# Altium PCB Slave_Button.PcbDoc
Units mil, origin at the board's own origin, x right, y up, seen from the top; angles counter-clockwise.
Board outline 2015 x 3255 mil, 2 copper layers (Top Layer, Bottom Layer); 23 components, 16 nets, 93 pads, 0 vias.
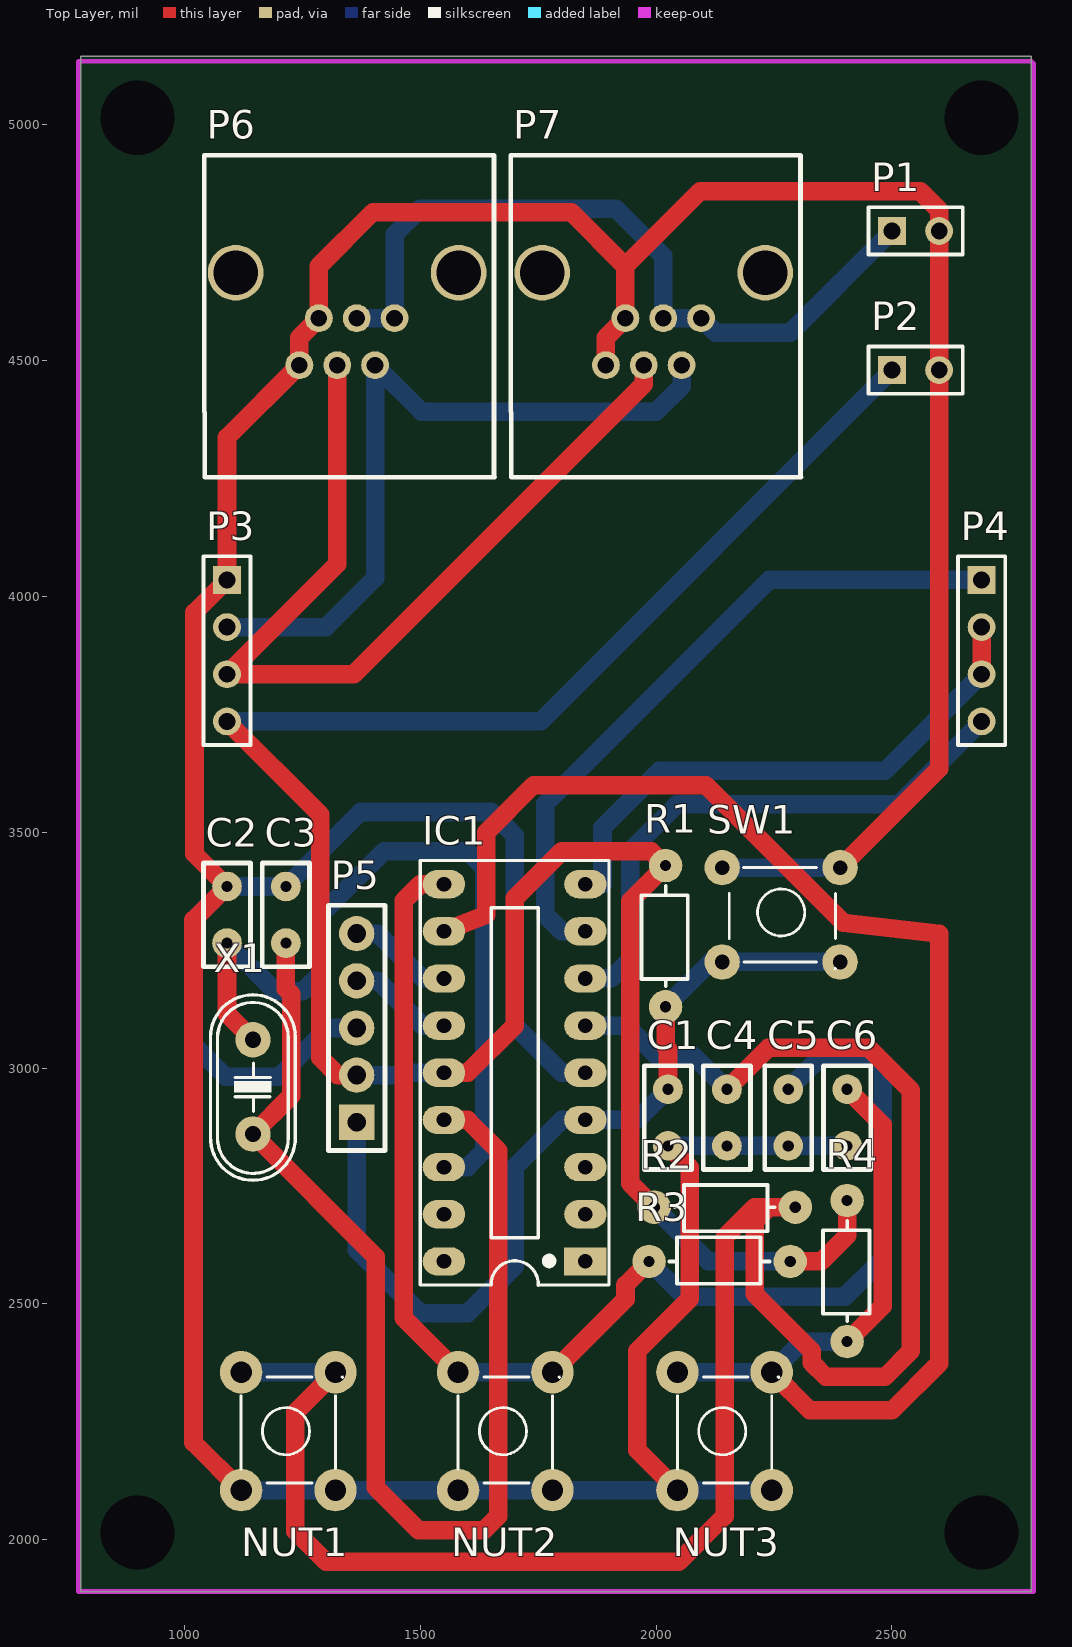
[diagram p0: Top Layer view]
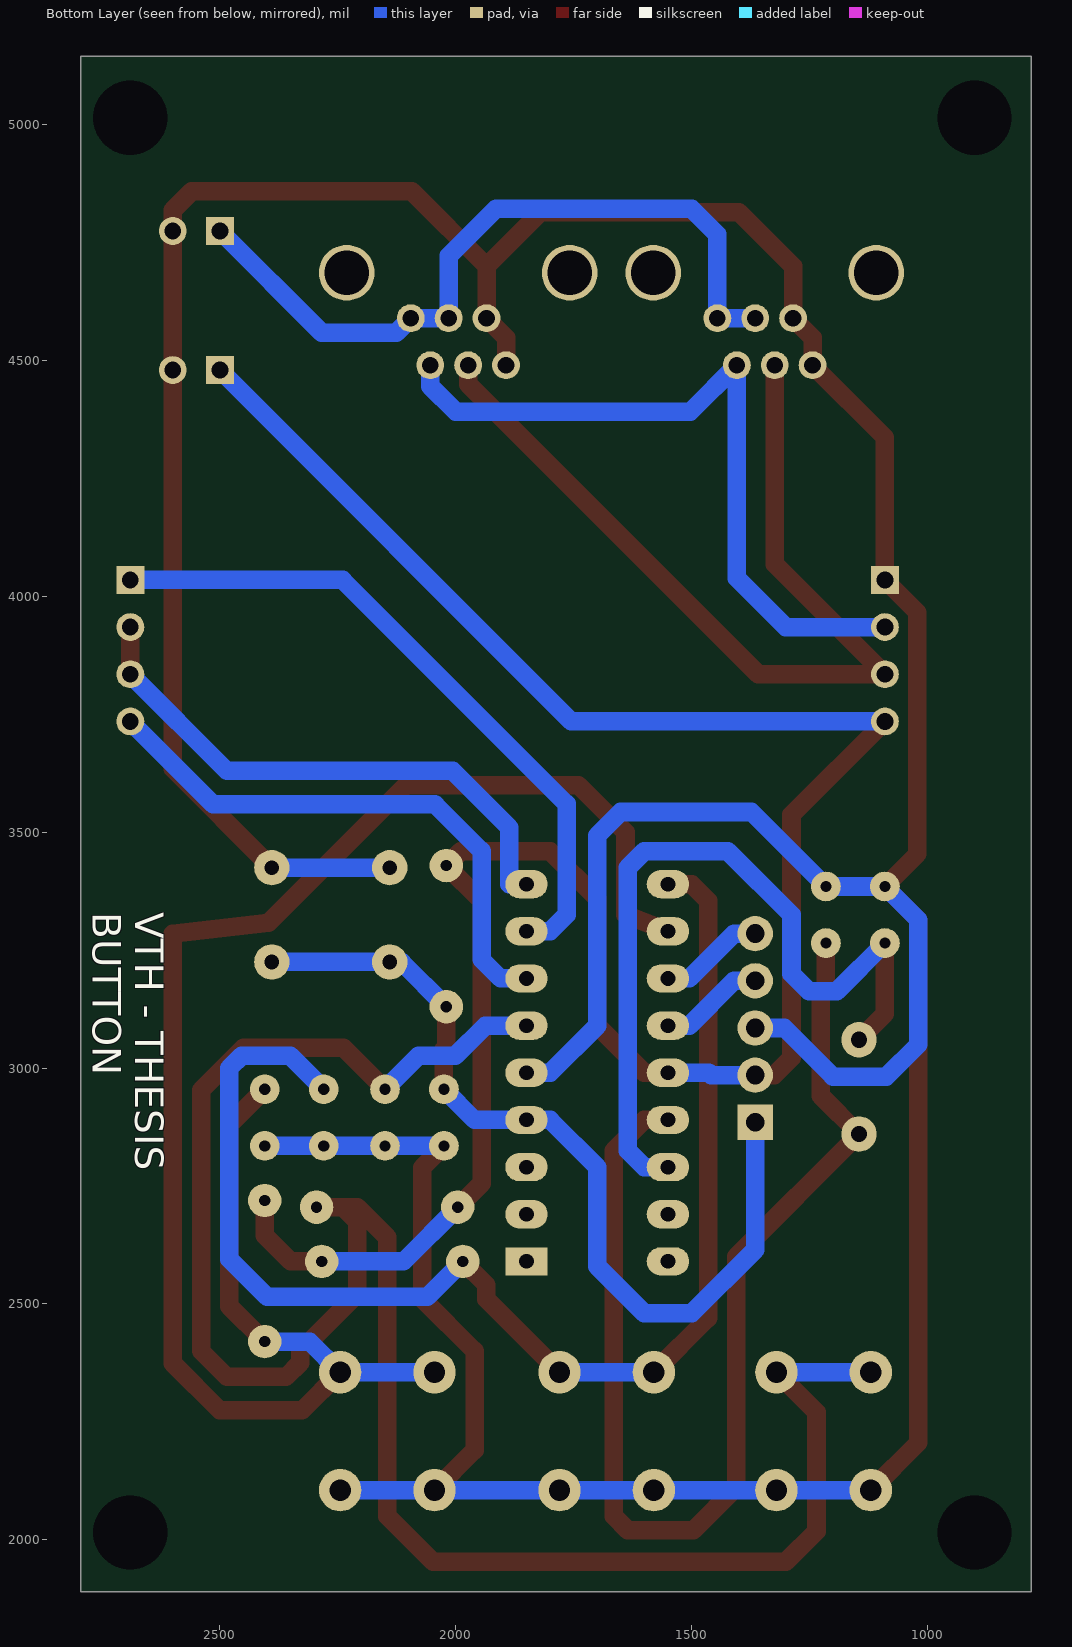
[diagram p1: Bottom Layer view, seen from below]
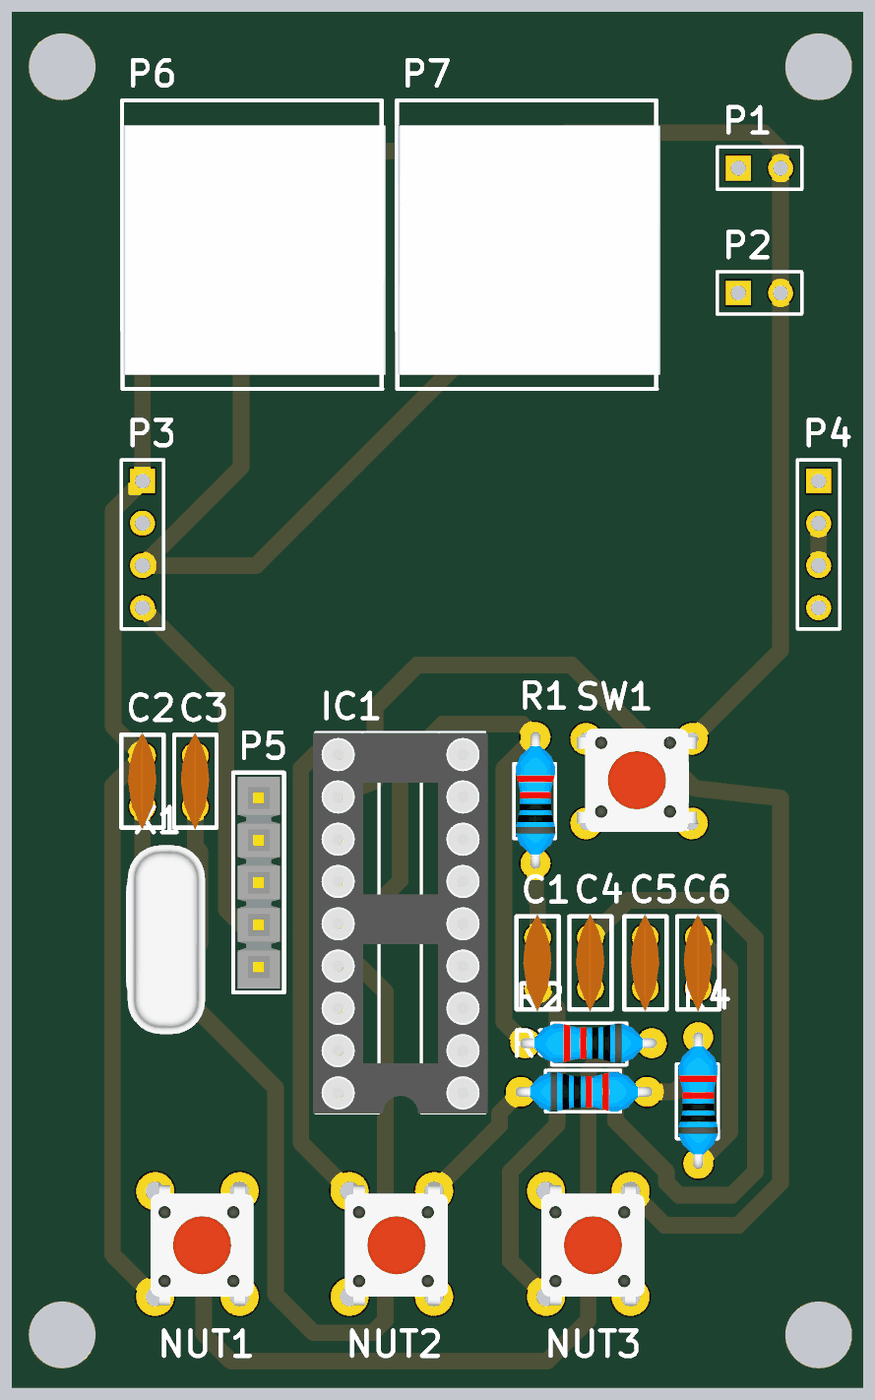
[diagram p2: 3D render of the assembled board from above, using the file's embedded part models]

## Layer stack, top to bottom
Top Solder: solder mask 0.4, Solder Resist, Dk 3.5
Top Layer: signal copper 1.4
Dielectric 1: dielectric 12.6, FR-4, Dk 4.8
Bottom Layer: signal copper 1.4
Bottom Solder: solder mask 0.4, Solder Resist, Dk 3.5

## Board outline
780,1890 2795,1890 2795,5145 780,5145

## Design rules (kind name [scope] priority, off if disabled: settings)
Clearance [All] p1: gap=19.68 ignorepadtopadclearanceinfootprint=FALSE
PolygonConnect [All] p1: connectstyle=Relief reliefconductorwidth=19.68 reliefentries=4 polygonreliefangle="90 Angle" airgapwidth=19.68
RoutingVias [All] p1: holewidth=28 width=50 viastyle="Through Hole" minholewidth=28 minwidth=50 maxholewidth=28 maxwidth=50
SolderMaskExpansion [All] p1: expansion=4
Width [All] p1: maxlimit=78.74 minlimit=19.68 preferedwidth=39.37
30 further rules are at their usual default settings.

## Components (designator, comment, footprint, x,y, rotation, side; value= is the part's Value field where it differs from the comment)
C1 "Capacitor Ceramic" "Cap Non-Pol 3mm" 2025,2895 r90 top value=100n
C2 "Cap Non-pol" "Cap Non-Pol 3mm" 1090,3325 r90 top value=22p
C3 "Cap Non-pol" "Cap Non-Pol 3mm" 1215,3325 r90 top value=22p
C4 "Capacitor Ceramic" "Cap Non-Pol 3mm" 2150,2895 r90 top value=100n
C5 "Capacitor Ceramic" "Cap Non-Pol 3mm" 2280,2895 r90 top value=100n
C6 "Capacitor Ceramic" "Cap Non-Pol 3mm" 2405,2895 r90 top value=100n
IC1 "PIC16F628A" DIP18/W0.3 1850,2590 r90 top
NUT1 "SW-4P-B" SW4#1 1120,2105 r90 top (schematic designator SW2)
NUT2 "SW-4P-B" SW4#1 1580,2105 r90 top (schematic designator SW3)
NUT3 "SW-4P-B" SW4#1 2045,2105 r90 top (schematic designator SW4)
P1 "Header 2" HDR1X2 2500,4775 r0 top
P2 "Header 2" HDR1X2 2500,4480 r0 top
P3 "Header 4" HDR1X4 1090,4035 r270 top
P4 "Header 4" HDR1X4 2690,4035 r270 top
P5 "Header 5" "Header 5" 1365,2885 r90 top
P6 "Header 8" RJ11 1403.98,4490.39 r180 top
P7 "Header 8" RJ11 2053.98,4490.39 r180 top
R1 "RES_SMD_0805" "RESISTOR 1/4W" 2020,3130 r90 top value=10k
R2 "RES_SMD_0805" "RESISTOR 1/4W" 2295,2705 r180 top value=10k
R3 "RES_SMD_0805" "RESISTOR 1/4W" 1985,2590 r0 top value=10k
R4 "RES_SMD_0805" "RESISTOR 1/4W" 2405,2420 r90 top value=10k
SW1 "SW7" SW4#2 2140,3425 r0 top value="Button chip 4 pin"
X1 "20Mhz" XT2 1145,2960 r90 top value=4Mhz

## Footprints (in the part's own frame and the unit in brackets; to place one, negate y for a bottom-side part, rotate by r counter-clockwise, add the part's x,y. Pads: shape width x height; smd on the part's side, far side on the other; paste and mask are expansions set on the pad)
"Cap Non-Pol 3mm" [mm] "Capacitor, Radial; Body 5.6 x 2.5 mm (L x W typ); Pin Spacing 3 mm (typ); Solder Pad 35mil"
  round 1.6 hole 0.6: 1(-1.524,0) 2(1.524,0)
  silkscreen extent -2.79,-1.27 2.79,1.27, body extent -2.92,-0.83 2.92,0.86, height 6.22
DIP18/W0.3 [mil] "18 PIN, W 300mil, Pitch 100mil"
  rect 60x90 hole 31: 1(0,0)
  oval 60x90 hole 31: 2(100,0) 3(200,0) 4(300,0) 5(400,0) 6(500,0) 7(600,0) 8(700,0) 9(800,0) 10(800,300) 11(700,300) 12(600,300) 13(500,300) 14(400,300) 15(300,300) 16(200,300) 17(100,300) 18(0,300)
  silkscreen extent -50,-50 850,350, body extent -51,-57 849,356, height 119
HDR1X2 [mm] "Connector; Header; 2 Position"
  rect 1.5x1.5 hole 0.9: 1(0,0)
  round 1.5 hole 0.9: 2(2.54,0)
  silkscreen extent -1.27,-1.27 3.81,1.27
HDR1X4 [mm] "Connector; Header; 4 Position"
  rect 1.5x1.5 hole 0.9: 1(0,0)
  round 1.5 hole 0.9: 2(2.54,0) 3(5.08,0) 4(7.62,0)
  silkscreen extent -1.27,-1.27 8.89,1.27
"Header 5" [mil] "Connector; Header; 5 Position; Solder Pad 35mil"
  rect 75x75 hole 40: 1(0,0)
  round 75 hole 40: 2(100,0) 3(200,0) 4(300,0) 5(400,0)
  silkscreen extent -60,-60 460,60, body extent -50,-50 450,50, height 83
"RESISTOR 1/4W" [mm] "P=0.25W, PITCH = 7.6 mm"
  round 1.8 hole 0.6: 1(0,0) 2(7.6,0)
  silkscreen extent 1.1,-1.2 6.5,1.3, body extent -0.31,-1.2 7.91,1.2, height 2.7
RJ11 [mm] "DIP 20, 20 PIN, W 300mil, Pin to pin 100mil"
  round 1.5 hole 0.9: 1(0,0) 2(2.04,0) 3(4.08,0) 4(-1.05,-2.53) 5(0.99,-2.53) 6(3.03,-2.53)
  round 3 hole 2.4: 7(-4.5,-4.98) 8(7.51,-4.98)
  silkscreen extent -6.43,-11.3 9.2,6.03, body extent -6.71,-9.8 9.11,5.19, height 12.87
SW4#1 [mil] "SW button 4pin, 250 x250 mil"
  round 90 hole 45: 1(0,0) 2(250,-200) 3(250,0) 4(0,-200)
  silkscreen extent 15,-215 240,0, body extent -34,-233 278,11, height 276
SW4#2 [mil] "SW button 4pin, 250 x250 mil"
  round 75 hole 31: 1(0,0) 2(250,-200) 3(250,0) 4(0,-200)
  silkscreen extent 15,-215 240,0, body extent -36,-220 276,24, height 276
XT2 [mil] "Footpin for Crystal 2 pin"
  round 75 hole 34: 1(-100,0) 2(100,0)
  silkscreen extent -198,-90 195,90, body extent -233,-93 213,90, height 138

## Part data
C1 C4 C5 C6: library part CapSMD, "Capacitor", LatestRevisionDate=17-Jul-2002, LatestRevisionNote="Re-released for DXP Platform.", PackageReference=RAD-0.3, Published=8-Jun-2000, Publisher="Altium Limited"
C2 C3: "Non-polarized Capacitor", LatestRevisionDate=17-Jul-2002, LatestRevisionNote="Re-released for DXP Platform.", PackageReference=RAD-0.3, Published=8-Jun-2000, Publisher="Altium Limited"
NUT1 NUT2 NUT3: library part SW-4PIN-BIG, "Switch Big 4 Pin", LatestRevisionDate=17-Jul-2002, LatestRevisionNote="Re-released for DXP Platform.", PackageReference=SPST-2, Published=24-Mar-1999, Publisher="Altium Limited"
P1 P2: "Header, 2-Pin", LatestRevisionDate=17-Jul-2002, LatestRevisionNote="Re-released for DXP Platform.", Publisher="Altium Limited"
P3 P4: "Header, 4-Pin", LatestRevisionDate=17-Jul-2002, LatestRevisionNote="Re-released for DXP Platform.", Publisher="Altium Limited"
P5: "Header, 5-Pin", LatestRevisionDate=17-Jul-2002, LatestRevisionNote="Re-released for DXP Platform.", Publisher="Altium Limited"
P6 P7: "Header, 8-Pin", LatestRevisionDate=17-Jul-2002, LatestRevisionNote="Re-released for DXP Platform.", Publisher="Altium Limited"
R1 R2 R3 R4: "RES_0805", LatestRevisionDate=17-Jul-2002, LatestRevisionNote="Re-released for DXP Platform.", PackageReference=AXIAL-0.4, Published=8-Jun-2000, Publisher="Altium Limited"
SW1: library part SW4, "Switch button 4 pin"
X1: library part XT2, "Crystal For all Crystal 2pin."

## Free pads (board coordinates)
  round 60 hole 157.48: 2(2690,5015) 3(900,5015) 4(900,2015) 5(2690,2015)

## Nets (pads, with @x,y where several pads share a name; then routed paths per layer and width w, separated by ;. In a path a pad name is that pad's centre, name@x,y a point inside that pad or via, vN(x,y) a via of type N, cw(c..) or ccw(c..) an arc to the next point about the centre after c; other vN are vias at no path point)
12V: P1.1 P6.4 P6.5 P7.4 P7.5 | length 1611.1
  Bottom Layer w39.37: P6.5 P6.4 1445.32,4767.63 1500,4822.32 1914.68,4822.32 2015,4722 P7.5 P7.4 2126.32,4559 2284,4559 P1.1
A: P3.2 P6.1 P7.1 | length 1566
  Bottom Layer w39.37: P3.2 1300,3935 1403.98,4038.98 P6.1 1502.37,4392 2000,4392 2053.98,4445.98 P7.1
B: P3.3 P6.2 P7.2 | length 1931
  Top Layer w39.37: P6.2 1323.66,4068.66 P3.3 1358.66,3835 1973.66,4450 P7.2
BUTTON1: C4.2 IC1.6 NUT1.2 NUT1.3 R2.1 | length 4327.2
  Top Layer w39.37: NUT1.2 1235,2270 1235,2018 1300,1953 2048,1953 2145,2050 2145,2641 2209,2705 2239,2705 ; C4.2 2238,3043 2450,3043 2540,2953 2540,2400 2485,2345 2360,2345 2330,2375 2330,2400 2209,2521 2209,2675 2239,2705 ; R2.1 2239,2705
  Bottom Layer w39.37: NUT1.3 NUT1.2 ; IC1.6 1937,3090 2001,3026 2079,3026 C4.2
BUTTON2: C5.2 IC1.10 NUT2.2 NUT2.3 R3.1 | length 2871.4
  Top Layer w39.37: IC1.10 1500,3390 1465,3355 1465,2470 NUT2.3 ; NUT2.2 1935,2510 1935,2540 R3.1
  Bottom Layer w39.37: NUT2.3 NUT2.2 ; R3.1 2060,2515 2400,2515 2480,2595 2480,3000 2454,3026 2351,3026 C5.2
BUTTON3: C6.2 IC1.11 NUT3.2 NUT3.3 R4.1 | length 3720.3
  Top Layer w39.37: IC1.11 1640,3325 1640,3500 1740,3600 2105,3600 2397,3308 2600,3285 2600,2374 2500,2274 2326,2274 NUT3.2 ; R4.1 2480,2495 2480,2880 C6.2
  Bottom Layer w39.37: NUT3.3 NUT3.2 2310,2420 R4.1
GND: C1.1 C2.2 C3.2 C4.1 C5.1 C6.1 IC1.5 NUT1.1 NUT1.4 NUT2.1 NUT2.4 NUT3.1 NUT3.4 P1.2 P2.2 P3.1 P5.3 P6.3 P6.6 P7.3 P7.6 SW1.1 SW1.3 | length 10662.2
  Top Layer w39.37: NUT1.1 1019,2206 1019,3314 C2.2 1021,3454 1021,3966 P3.1 1090,4337.05 P6.3 1243.35,4548.66 P6.6 1284.69,4700 1399.69,4815 1819.69,4815 1934.69,4700 ; P7.3 1893.35,4548.66 P7.6 1934.69,4700 ; C1.1 2071,2789 2071,2511 1960,2400 1960,2190 NUT3.1 ; SW1.3 2600,3635 P2.2 P1.2 2600,4819 2560,4859 2093,4859 1934.69,4700.69 1934.69,4700
  Bottom Layer w39.37: NUT1.1 NUT1.4 NUT2.1 NUT2.4 NUT3.1 NUT3.4 ; P5.3 1303,3085 1200,2982 1087,2982 1019,3050 1019,3314 C2.2 C3.2 1373,3543 1650,3543 1700,3493 1700,3090 1800,2990 IC1.5 ; C1.1 C4.1 C5.1 C6.1 ; SW1.1 SW1.3
MCLR: C1.2 IC1.4 P5.1 R1.1 SW1.2 SW1.4 | length 1892.1
  Top Layer w39.37: R1.1 2020,3045 2025,3040 C1.2
  Bottom Layer w39.37: P5.1 1365,2615 1500,2480 1600,2480 1700,2580 1700,2790 1800,2890 IC1.4 1960,2890 C1.2 ; R1.1 2115,3225 SW1.4 SW1.2
PGC: IC1.12 P5.5 | length 224.4
  Bottom Layer w39.37: P5.5 1410,3285 1505,3190 IC1.12
PGD: IC1.13 P5.4 | length 224.4
  Bottom Layer w39.37: P5.4 1410,3185 1505,3090 IC1.13
RXD: IC1.7 P4.4 | length 1200.5
  Bottom Layer w39.37: IC1.7 1905,3190 1945.2,3230.2 1945.2,3460.2 2044,3559 2514,3559 P4.4
SEC: IC1.9 P4.2 P4.3 | length 1194.5
  Top Layer w39.37: P4.3 P4.2
  Bottom Layer w39.37: IC1.9 1886.14,3390 1886.14,3509.8 2006.34,3630 2485,3630 P4.3
TXD: IC1.8 P4.1 | length 1456.3
  Bottom Layer w39.37: IC1.8 1800,3290 1765,3325 1765,3560.04 2239.96,4035 P4.1
VCC: IC1.14 P2.1 P3.4 P5.2 R1.2 R2.2 R3.2 R4.2 | length 4958.8
  Top Layer w39.37: P3.4 1288,3537 1288,3022 1325,2985 P5.2 ; IC1.14 1600,2990 1700,3090 1700,3360 1800,3460 1989.21,3460 R1.2 1945,3354.21 1945,2755.79 R2.2 ; R3.2 2350,2590 2405,2645 R4.2
  Bottom Layer w39.37: P3.4 1755,3735 P2.1 ; P5.2 1458,2985 1463,2990 IC1.14 ; R2.2 2110.79,2590 R3.2
XT1: C2.1 IC1.16 X1.2 | length 1725.3
  Top Layer w39.37: C2.1 1090,3115 X1.2
  Bottom Layer w39.37: C2.1 1192,3163 1251,3163 1288,3200 1288,3325 1423,3460 1600,3460 1635,3425 1635,2825 1600,2790 IC1.16
XT2: C3.1 IC1.15 X1.1 | length 2526.8
  Top Layer w39.37: C3.1 1215,3168 1226,3157 1226,2941 X1.1 1405,2600 1405,2111 1496,2020 1635,2020 1665,2050 1665,2825 1600,2890 IC1.15
pads on no net: IC1.1 IC1.2 IC1.3 IC1.17 IC1.18 P6.7 P6.8 P7.7 P7.8

## Keep-outs
Top Layer:
  lines w10: 775,1890 1400,1890 2280,1890 2800,1890 2800,5130 2795,5135 775,5135 775,1890

## Silkscreen, mask and mechanical layers (free items; w line width, h text height)
Bottom Overlay:
  text "VTH - THESIS / BUTTON" at 2770,3330 h60 r90